# EAGLE board projek relay portal parkir kabel bawah tanah (EAGLE 9.6.2)
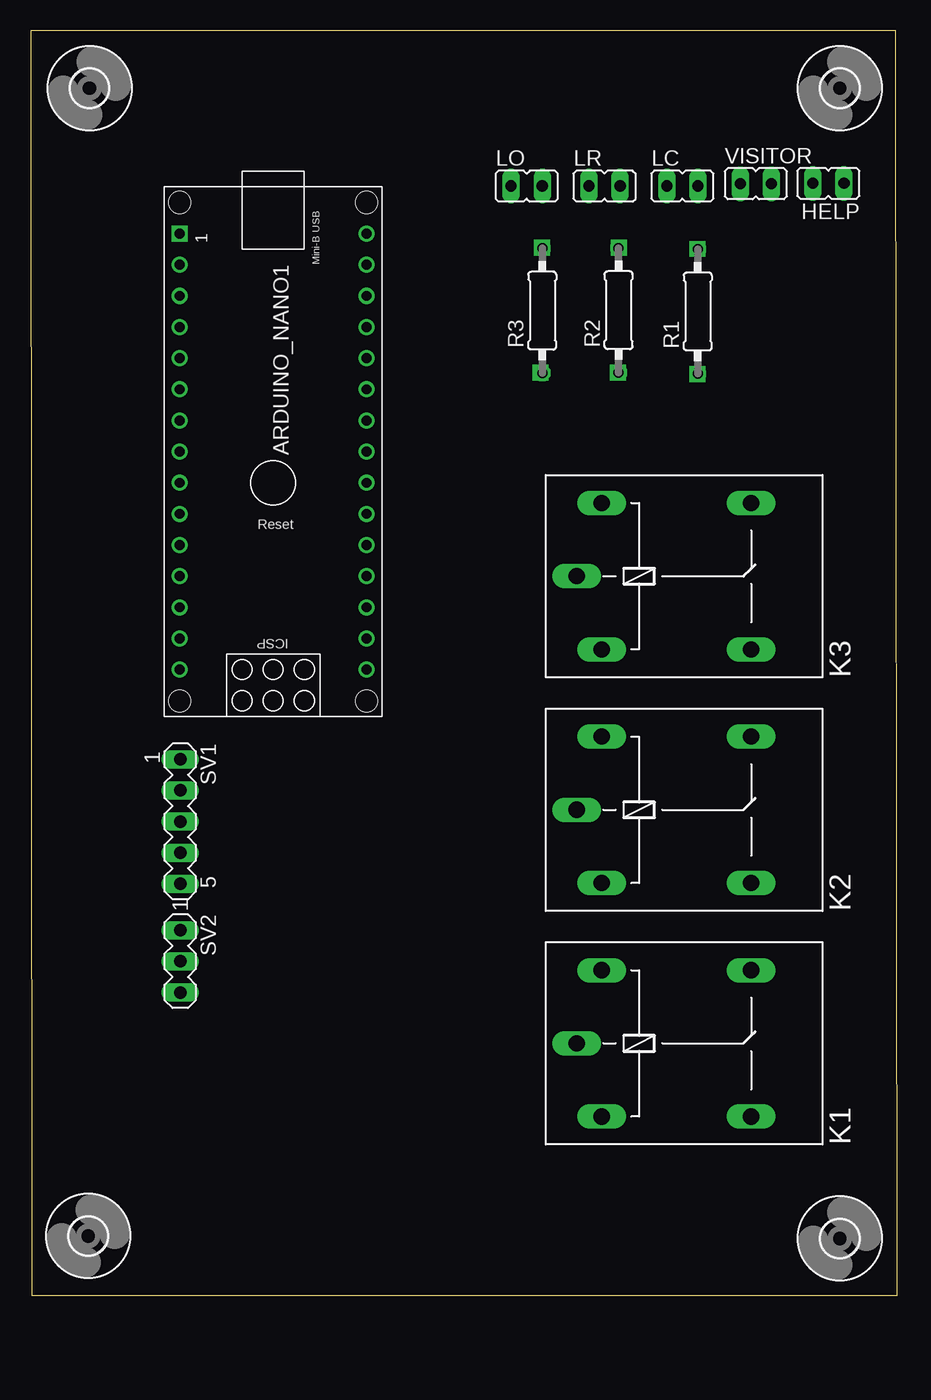
[diagram p0: board, top side]
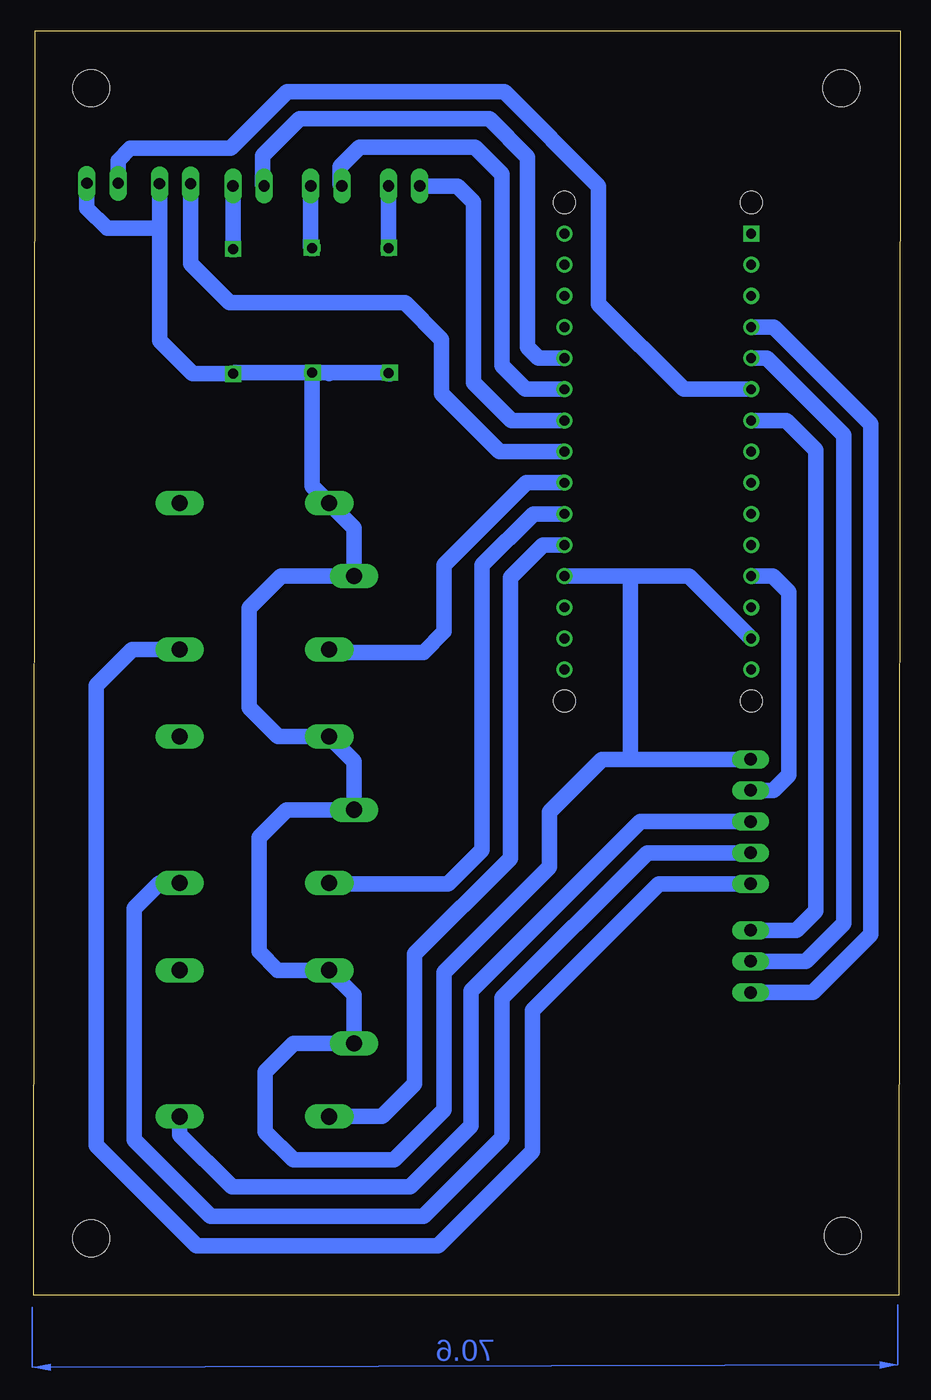
[diagram p1: board, bottom side, seen from below]

Size 70.67 x 103.15 mm. Coordinates in mm from the lower left corner, seen from the top.
Outline: 0.1,0 70.67,0 70.57,103.15 0,103.15 0.1,0
Copper layers (1*16): Top 0.035mm / dielectric 1.5mm / Bottom 0.035mm
Design rules "default": minimum track width 6mil, minimum drill 0.35mm, track to track 6mil, track to pad 6mil, pad to pad 6mil, via to via 6mil, smd to smd 6mil, copper to edge 40mil, drill to drill 6mil, minimum pad ring 10mil, minimum via ring 8mil, stop-mask expansion 4mil, vias tented up to drill 0mil, thermal gap 10mil

## Footprints (pad centres in the part's own frame; a part is rotated, then mirrored left to right if it is on the bottom)
ARDUINO_NANO = drill 0.8 square: 1 -20.32,-7.62 | drill 0.8: 2 -17.78,-7.62; 3 -15.24,-7.62; 4 -12.7,-7.62; 5 -10.16,-7.62; 6 -7.62,-7.62; 7 -5.08,-7.62; 8 -2.54,-7.62; 9 0,-7.62; 10 2.54,-7.62; 11 5.08,-7.62; 12 7.62,-7.62; 13 10.16,-7.62; 14 12.7,-7.62; 15 15.24,-7.62; 16 15.24,7.62; 17 12.7,7.62; 18 10.16,7.62; 19 7.62,7.62; 20 5.08,7.62; 21 2.54,7.62; 22 0,7.62; 23 -2.54,7.62; 24 -5.08,7.62; 25 -7.62,7.62; 26 -10.16,7.62; 27 -12.7,7.62; 28 -15.24,7.62; 29 -17.78,7.62; 30 -20.32,7.62 | hole 1.778: -22.86,-7.62; -22.86,7.62; 17.78,7.62; 17.78,-7.62
3,0 = hole 3: 0,0
JP1 = drill 0.914 long: 1 0,-1.27; 2 0,1.27
G5LE = drill 1.321 long: 1 -7.493,-5.969; 2 -7.493,5.969; O 4.699,5.969; P -9.525,0; S 4.699,-5.969
0207/10 = drill 0.813 octagon: 1 -5.08,0; 2 5.08,0
MA05-1 = drill 1.016 long: 1 -5.08,0; 2 -2.54,0; 3 0,0; 4 2.54,0; 5 5.08,0
MA03-1 = drill 1.016 long: 1 -2.54,0; 2 0,0; 3 2.54,0

## Placement (x,y rotation side)
ARDUINO_NANO1  [ARDUINO_NANO]  19.78,66.28 270 top
H1  MOUNT-HOLE3.0  [3,0]  66,4.65 0 top
H2  MOUNT-HOLE3.0  [3,0]  66,98.45 0 top
H3  MOUNT-HOLE3.0  [3,0]  4.8,98.45 0 top
H4  MOUNT-HOLE3.0  [3,0]  4.7,4.85 0 top
HELP  [JP1]  65.07,90.7 90 top
K1  G5L  [G5LE]  54.07,20.56 0 top
K2  G5L  [G5LE]  54.07,39.61 0 top
K3  G5L  [G5LE]  54.07,58.66 0 top
LC  [JP1]  53.16,90.48 270 top
LO  [JP1]  40.46,90.48 270 top
LR  [JP1]  46.81,90.48 270 top
R1  [0207/10]  54.41,80.25 90 top
R2  [0207/10]  47.96,80.35 90 top
R3  [0207/10]  41.73,80.32 90 top
SV1  [MA05-1]  12.2,38.65 270 top
SV2  [MA03-1]  12.2,27.25 270 top
VISITOR  [JP1]  59.15,90.66 270 top

## Library data of the parts
ARDUINO_NANO1 = ArduinoNanoV30
H1-H4 = holes
HELP LC LO LR VISITOR = jumper
K1-K3 = relay; OC_FARNELL: unknown; OC_NEWARK: unknown
R1-R3 = rcl; SPICEPREFIX: R
SV1 SV2 = con-lstb; OC_FARNELL: unknown; OC_NEWARK: unknown

## Nets
+5V: ARDUINO_NANO1.12 SV1.2
GND: ARDUINO_NANO1.14 ARDUINO_NANO1.19 HELP.1 K1.2 K1.P K2.2 K2.P K3.2 K3.P R1.1 R2.1 R3.1 SV1.1 VISITOR.2
LC: ARDUINO_NANO1.26 LC.1
LO: ARDUINO_NANO1.24 LO.1
LR: ARDUINO_NANO1.25 LR.1
N$1: ARDUINO_NANO1.6 HELP.2
N$3: ARDUINO_NANO1.4 SV2.3
N$5: ARDUINO_NANO1.5 SV2.2
N$6: ARDUINO_NANO1.7 SV2.1
N$7: K1.S SV1.3
N$8: K2.S SV1.4
N$10: ARDUINO_NANO1.23 VISITOR.1
N$11: LO.2 R3.2
N$12: LC.2 R1.2
N$13: LR.2 R2.2
N$15: K3.S SV1.5
RC: ARDUINO_NANO1.21 K2.1
RO: ARDUINO_NANO1.20 K1.1
RS: ARDUINO_NANO1.22 K3.1
VIN: ARDUINO_NANO1.15

## Tracks (layer width: path | path; a pad name or v marks a point on that pad's centre or on a via)
+5V
  Bottom 1.27: SV1.2 10.36,41.19 9.1,42.45 9.1,57.35 10.41,58.66 ARDUINO_NANO1.12
GND
  Bottom 1.27: 46.5,75.27 41.76,75.27 R3.1 41.64,75.15 | 46.5,75.27 R2.1 | R2.1 54.31,75.27 R1.1 57.72,75.17 60.42,77.87 60.42,87.15 | 46.4,64.45 K3.2 | 21.8,58.66 17.24,58.66 ARDUINO_NANO1.14 | 21.8,58.66 ARDUINO_NANO1.19 | 60.42,87.15 VISITOR.2 | 46.58,75.19 46.5,75.27 | K3.2 44.55,62.6 K3.P 50.49,58.66 53.1,56.05 53.1,47.95 50.73,45.58 K2.2 44.55,43.55 K2.P 50.04,39.61 52.3,37.35 52.3,28.05 50.78,26.53 K1.2 44.55,24.5 K1.P 49.49,20.56 51.8,18.25 51.8,13.35 49.5,11.05 41.3,11.05 37.2,15.15 37.2,26.35 28.6,34.95 28.6,39.45 24.32,43.73 22,43.73 | K3.2 47.96,66.01 R2.1 | HELP.1 66.34,88.69 64.7,87.05 60.52,87.05 60.42,87.15 | 22,43.73 SV1.1 | 22,43.73 22,58.46 21.8,58.66
LC
  Bottom 1.27: ARDUINO_NANO1.26 29.49,76.44 30.4,77.35 30.4,92.85 33.5,95.95 49,95.95 52,92.95 52,90.59 LC.1
LO
  Bottom 1.27: ARDUINO_NANO1.24 31.71,71.36 34.8,74.45 34.8,89.15 36.13,90.48 LO.1
LR
  Bottom 1.27: ARDUINO_NANO1.25 30.55,73.9 32.5,75.85 32.5,91.45 34.7,93.65 44.1,93.65 45.7,92.05 45.7,90.64 LR.1
N$1
  Bottom 1.27: ARDUINO_NANO1.6 17.65,73.9 24.6,80.85 24.6,90.45 32.3,98.15 50,98.15 54.6,93.55 62.8,93.55 63.8,92.55 HELP.2
N$3
  Bottom 1.27: SV2.3 7.14,24.71 2.4,29.45 2.4,71.05 10.33,78.98 ARDUINO_NANO1.4
N$4  (via drill 0.5 pad 1.3)
  other vias: 54.4,85.35
N$5
  Bottom 1.27: SV2.2 7.7,27.25 4.6,30.35 4.6,70.15 10.9,76.45 ARDUINO_NANO1.5
N$6
  Bottom 1.27: SV2.1 8.46,29.79 6.9,31.35 6.9,68.95 9.31,71.36 ARDUINO_NANO1.7
N$7
  Bottom 1.27: K1.S 58.77,13.12 54.5,8.85 40,8.85 35,13.85 35,24.85 21.2,38.65 SV1.3
N$8
  Bottom 1.27: K2.S 60.41,33.64 62.5,31.55 62.5,12.7 56.25,6.45 38.9,6.45 32.5,12.85 32.5,24.25 20.64,36.11 SV1.4
N$9  (via drill 0.5 pad 1.3)
  other vias: 48,85.45
N$10
  Bottom 1.27: ARDUINO_NANO1.23 32.67,68.82 37.4,73.55 37.4,77.95 40.4,80.95 54.7,80.95 57.88,84.13 VISITOR.1
N$11
  Bottom 1.27: R3.2 LO.2
N$12
  Bottom 1.27: R1.2 54.41,90.46 LC.2
N$13
  Bottom 1.27: LR.2 48.08,85.55 R2.2
N$14  (via drill 0.5 pad 1.3)
  other vias: 41.7,85.45
N$15
  Bottom 1.27: K3.S 62.66,52.69 65.6,49.75 65.6,12.25 57.4,4.05 37.7,4.05 30,11.75 30,23.25 19.68,33.57 SV1.5
N$16  (via drill 0.5 pad 1.3)
  other vias: 41.6,75.25
N$17  (via drill 0.5 pad 1.3)
  other vias: 47.9,75.25
N$18  (via drill 0.5 pad 1.3)
  other vias: 54.4,75.15
RC
  Bottom 1.27: ARDUINO_NANO1.21 29.91,63.74 34.1,59.55 34.1,36.35 36.9,33.55 46.49,33.55 K2.1
RO
  Bottom 1.27: K1.1 42.26,14.59 39.6,17.25 39.6,27.85 31.8,35.65 31.8,58.55 29.15,61.2 ARDUINO_NANO1.20
RS
  Bottom 1.27: ARDUINO_NANO1.22 30.47,66.28 37.2,59.55 37.2,54.15 38.9,52.45 46.34,52.45 K3.1
(copper drawn outside any net)
  shapes: Bottom area x1